# Altium PCB MachRada.PcbDoc
Units mil, origin at the board's own origin, x right, y up, seen from the top; angles counter-clockwise.
Board outline 3200 x 2595 mil, 2 copper layers (Top Layer, Bottom Layer); 35 components, 30 nets, 106 pads, 2085 vias.
Unrouted connection lines stored in the file: 1.
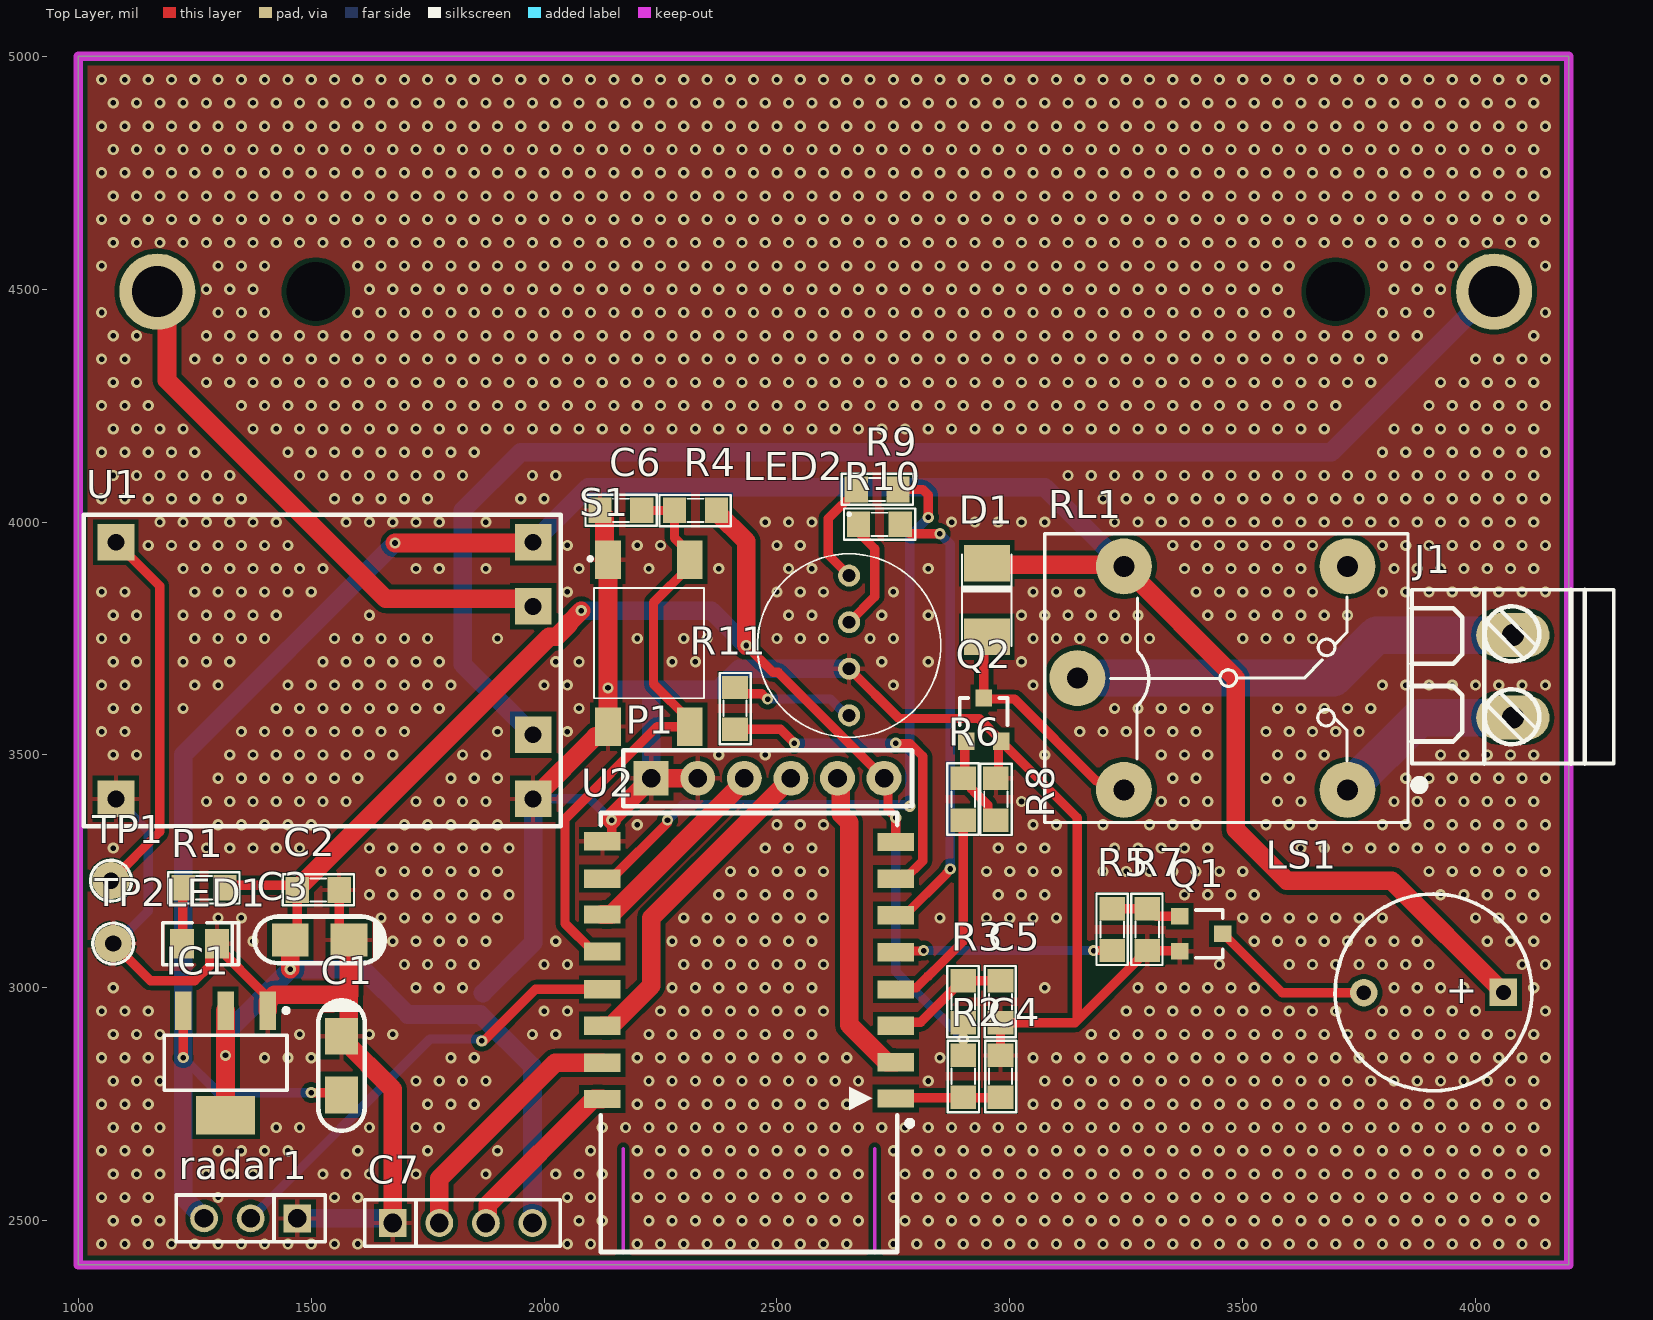
[diagram p0: Top Layer view]
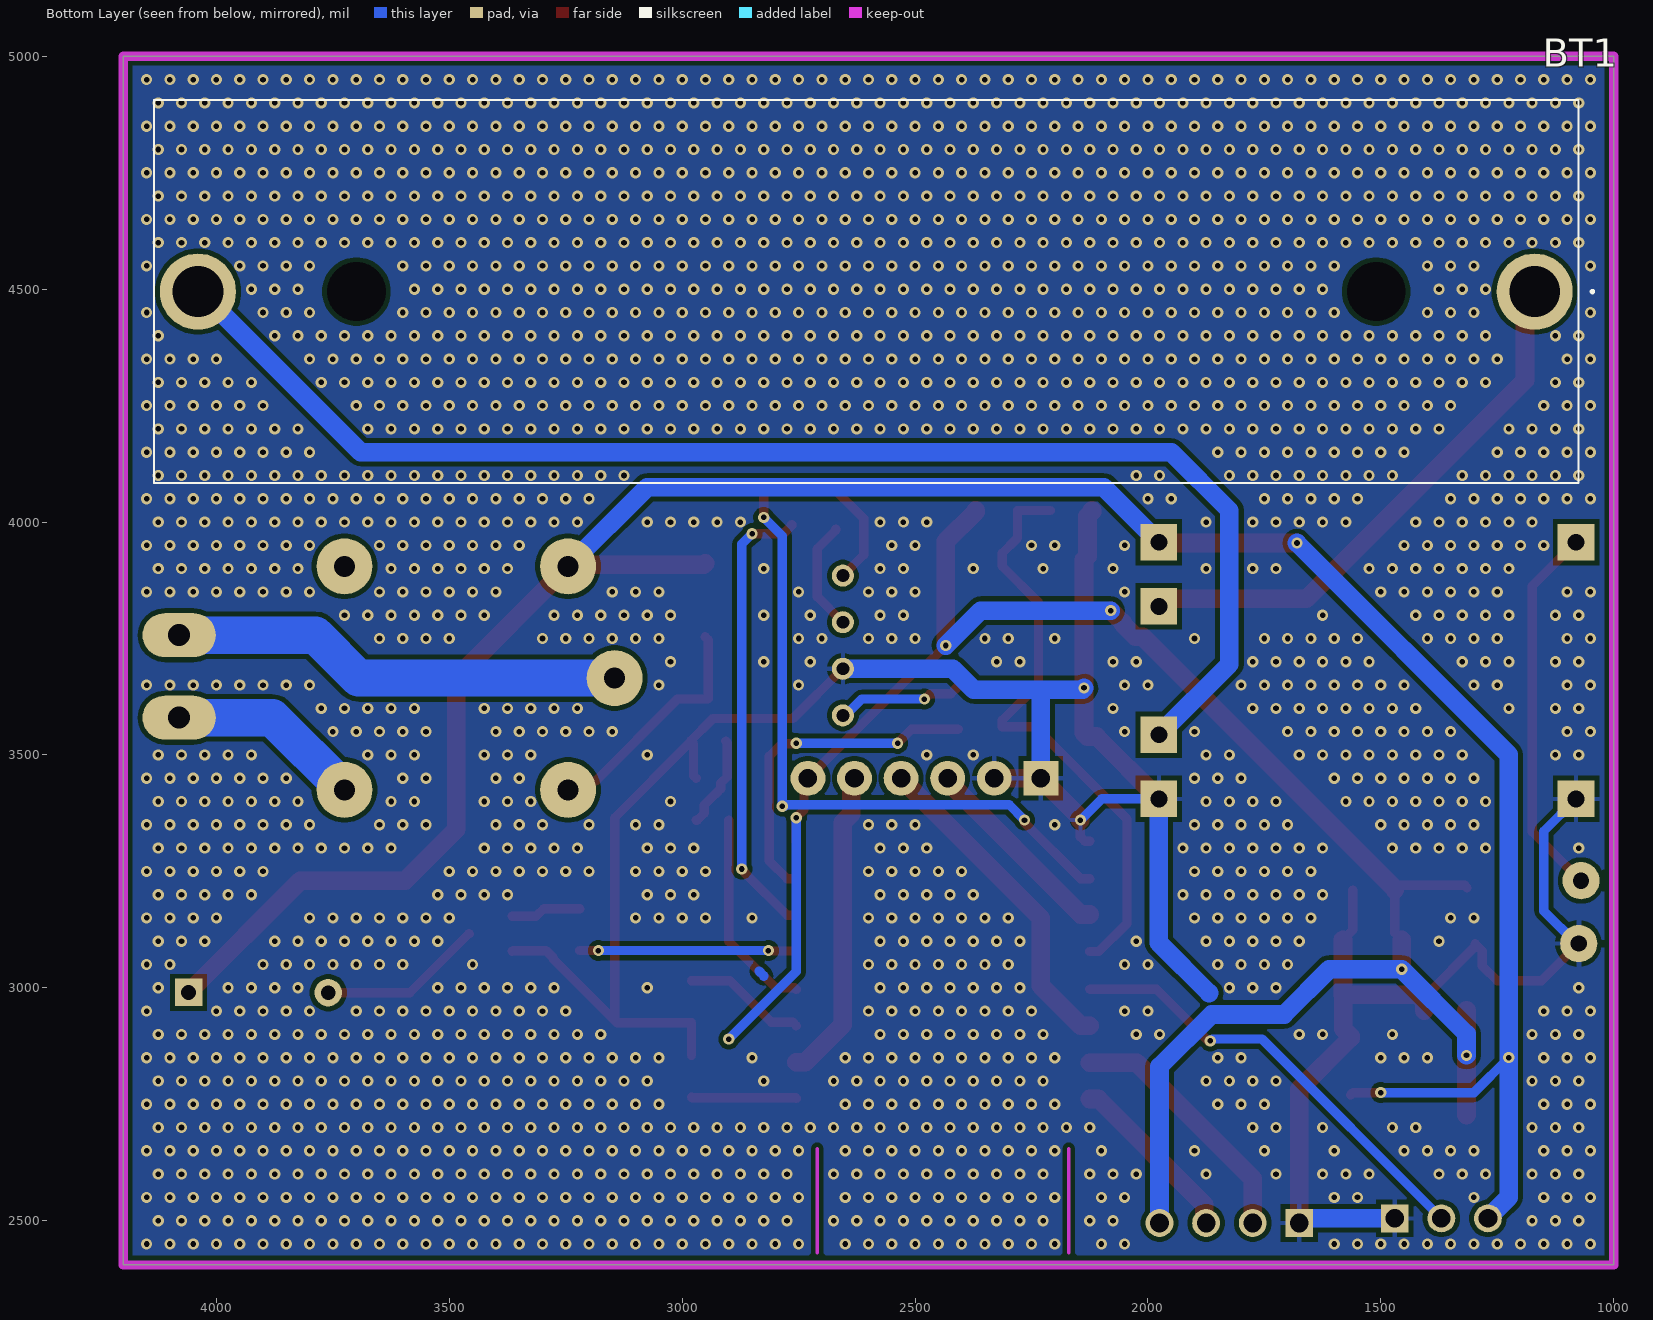
[diagram p1: Bottom Layer view, seen from below]
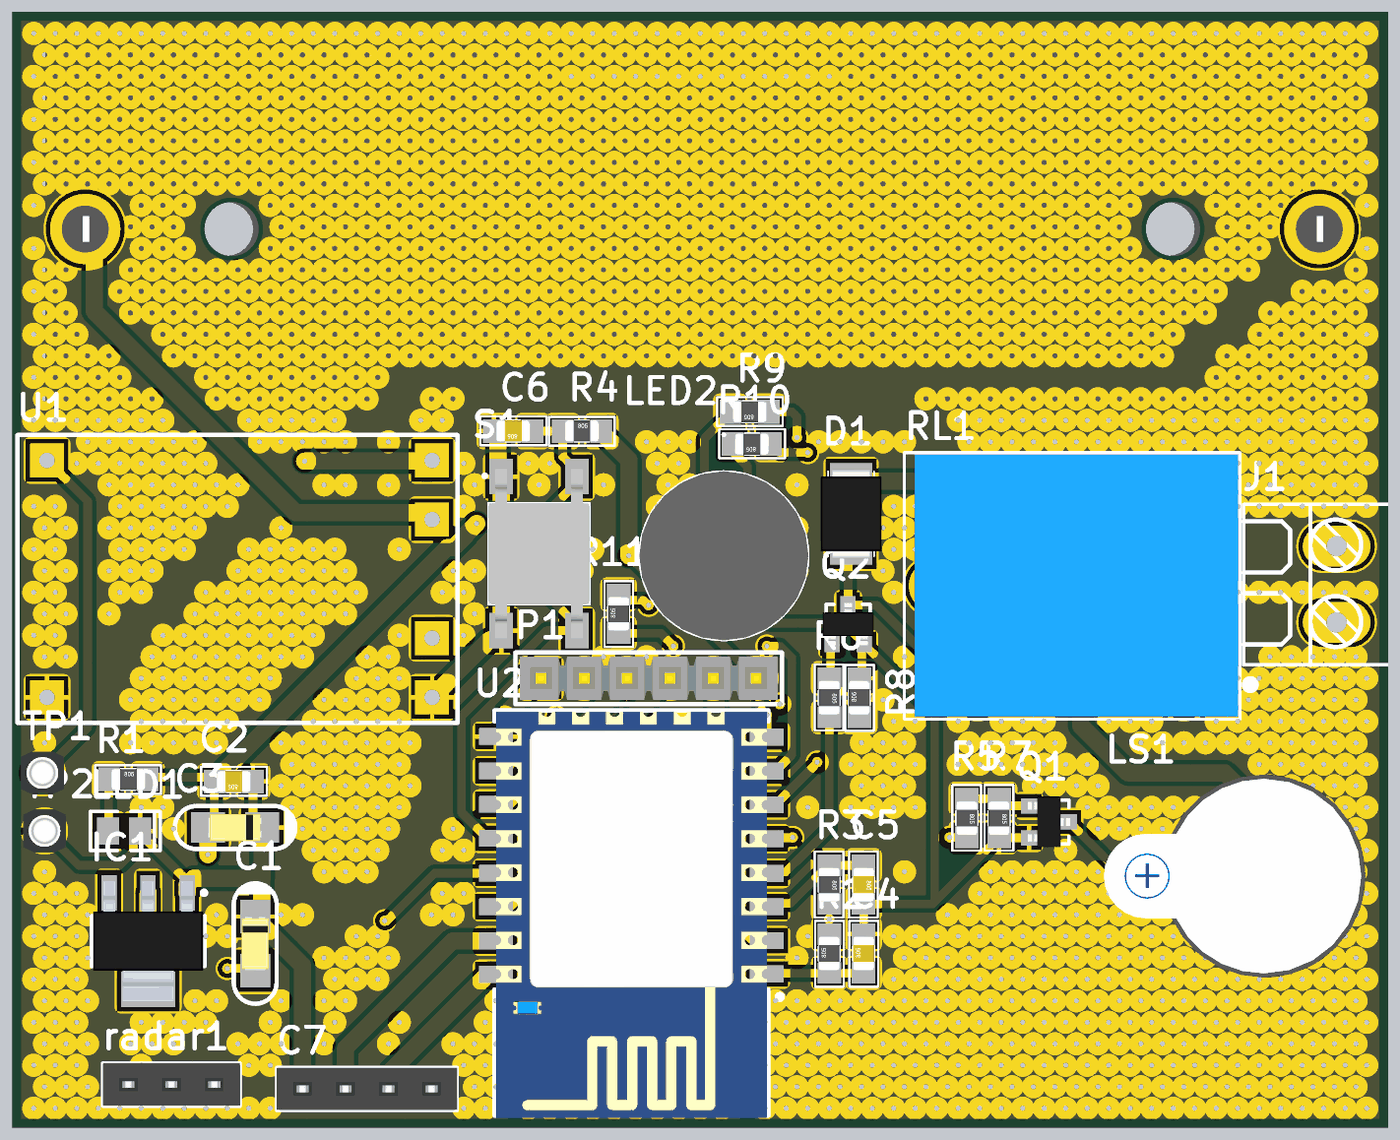
[diagram p2: 3D render of the assembled board from above, using the file's embedded part models]

## Layer stack, top to bottom
Top Solder: solder mask 0.4, Solder Resist, Dk 3.5
Top Layer: signal copper 1.4
Dielectric 1: dielectric 12.6, FR-4, Dk 4.8
Bottom Layer: signal copper 1.4
Bottom Solder: solder mask 0.4, Solder Resist, Dk 3.5

## Board outline
1000,2405 1000,5000 4200,5000 4200,2405

## Design rules (kind name [scope] priority, off if disabled: settings)
Clearance Clearance_1 [All vs InPolygon] p1: gap=10 ignorepadtopadclearanceinfootprint=FALSE except(0: Arc-Hole Track-Hole SMDPad-Hole THPad-Hole Via-Hole Fill-Hole Poly-Hole Region-Hole Text-Hole)
Clearance [All] p2: gap=6 ignorepadtopadclearanceinfootprint=FALSE
PolygonConnect [All] p1: connectstyle=Relief reliefconductorwidth=10 reliefentries=4 polygonreliefangle="90 Angle" airgapwidth=10
RoutingVias [All] p1: holewidth=12 width=24 viastyle="Through Hole" minholewidth=12 minwidth=24 maxholewidth=12 maxwidth=24
SolderMaskExpansion SolderMaskExpansion_1 [IsVia] p1: expansion=4 istentingtop=FALSE
SolderMaskExpansion [All] p2: expansion=15 istentingtop=FALSE
Width [All] p1: maxlimit=80 minlimit=10 preferedwidth=40
30 further rules are at their usual default settings.

## Components (designator, comment, footprint, x,y, rotation, side; value= is the part's Value field where it differs from the comment)
BT1 "BH-18650-PC" "PIN 18650PC" 1169.65,4495 r0 bottom
C1 "10uF" C1206 1568,2840 r180 top value=0,1uF/300V
C2 "0,1uF" SM-CAP-0805 1560,3210 r180 top value=0,1uF/300V
C3 "10uF" C1206 1525,3100 r90 top value=0,1uF/300V
C4 "100nF" SM-CAP-0805 2980,2765 r90 top value=0,1uF/300V
C5 "100nF" SM-CAP-0805 2980,3015 r270 top value=0,1uF/300V
C6 "100nF" SM-CAP-0805 2210,4025 r180 top value=0,1uF/300V
C7 "JP4" JP4-C1T 1675,2495 r0 top
D1 "SS34" DIOT 2950,3865 r0 top
IC1 "LM1117" LM1117-3V3-5V 1335,2800 r270 top value=LM317
J1 "DOMINO2" DOMINO2 4106.54,3704.61 r180 top (schematic designator j1)
LED1 "HSMH-C170" LED 1250,3095 r180 top
LED2 "COM-11120" "LED RGB 10MM" 2655,3885 r270 top
LS1 "SPEAKER" speaker 4060,2990 r180 top
P1 "Header 6" "Header 6" 2230,3450 r0 top
Q1 "MMBT3904" "MMBT 3904" 3430,3115 r270 top
Q2 "MMBT3904" "MMBT 3904" 2945,3595 r0 top
R1 "1k" SM-RES-0805 1225,3215 r0 top value="R1/4W - 1K"
R2 "1k" SM-RES-0805 2900,2765 r90 top value="R1/4W - 1K"
R3 "1k" SM-RES-0805 2900,3015 r270 top value="R1/4W - 1K"
R4 "1k" SM-RES-0805 2280,4025 r0 top value="R1/4W - 1K"
R5 "1k" SM-RES-0805 3220,3170 r270 top value="R1/4W - 1K"
R6 "1k" SM-RES-0805 2900,3450 r270 top value="R1/4W - 1K"
R7 "1k" SM-RES-0805 3295,3170 r270 top value="R1/4W - 1K"
R8 "1k" SM-RES-0805 2970,3360 r90 top value="R1/4W - 1K"
R9 "1k" SM-RES-0805 2760,4070 r180 top value="R1/4W - 1K"
R10 "1k" SM-RES-0805 2765,3995 r180 top value="R1/4W - 1K"
R11 "1k" SM-RES-0805 2410,3555 r90 top value="R1/4W - 1K"
radar1 "JP3" JP3-C1T 1470,2505 r180 top
RL1 "Relay 10A/12V" "RELAY 5" 3470,3665 r0 top value="Relay SPDT, 10A, 12V"
S1 "3-1437565-0" "Button SMD" 2225,3740 r0 top
TP1 "TP" TP1 1070,3230 r90 top value="Test Point"
TP2 "TP" TP1 1075,3095 r90 top value="Test Point"
U1 "Module TP4056" "Module TP4056" 1420,3850 r0 top
U2 "MODUL ESP 8266" "esp8622 v7" 2406.04,2951.11 r180 top

## Footprints (in the part's own frame and the unit in brackets; to place one, negate y for a bottom-side part, rotate by r counter-clockwise, add the part's x,y. Pads: shape width x height; smd on the part's side, far side on the other; paste and mask are expansions set on the pad)
"Button SMD" [mm]
  rect 1.4x2.1 smd: 1(-2.23,4.55) 2(-2.23,-4.55) 3(2.23,4.55) 4(2.23,-4.55)
  silkscreen extent -3.3,-3 3,4.7, body extent -3,-5 3,5, height 4.38
C1206 [mil]
  rect 70.87x78.74 smd: 1(3,-56) 2(3,70)
  silkscreen extent -47,-133 53,147, body extent -29,-56 34,70, height 63
DIOT [mm]
  rect 2.5x2 smd: 1(0.019,-2.824) 2(0.019,1.176)
  silkscreen extent -1.33,-3.32 1.42,1.68, body extent -1.78,-3.47 1.82,1.83, height 2.45
DOMINO2 [mm]
  oval 4x2.4 hole 1.2: 1(0.674,3.165) 2(0.674,-1.335)
  silkscreen extent -4.83,-3.81 6.17,7.09, body extent -4.83,-3.81 6.17,5.67, height 8.6
"esp8622 v7" [mm]
  rect 2x1 smd: 1(-8.864,4.792) 2(-8.864,2.822) 3(-8.864,0.822) 4(-8.864,-1.148) 5(-8.864,-3.188) 6(-8.864,-5.198) 7(-8.864,-7.188) 8(-8.864,-9.198) 9(7.136,-9.238) 10(7.136,-7.198) 11(7.136,-5.238) 12(7.136,-3.218) 13(7.136,-1.158) 14(7.136,0.822) 15(7.136,2.842) 16(7.136,4.822)
  Keep-Out Layer lines w0.203: 5.994,13.189 5.994,7.544 ; -7.722,13.189 -7.722,7.544
  silkscreen extent -9.78,-10.78 7.22,13.16, body extent -8.86,-10.7 7.14,13.3, height 2.75
"Header 6" [mil] "Connector; Header; 6 Position; Solder Pad 35mil"
  rect 75x75 hole 40: 1(0,0)
  round 75 hole 40: 2(100,0) 3(200,0) 4(300,0) 5(400,0) 6(500,0)
  silkscreen extent -60,-60 560,60, body extent -50,-50 550,50, height 330
JP3-C1T [mm] "3 row, straight, gold plating"
  rect 1.52x1.52 hole 1.02: 1(0,0)
  round 1.52 hole 1.02: 2(2.54,0) 3(5.08,0)
  silkscreen extent -1.52,-1.27 6.6,1.27, body extent -1.52,-1.25 6.6,1.25, height 8.51
JP4-C1T [mm] "4 row, straight, gold plating"
  rect 1.52x1.52 hole 1.02: 1(0,0)
  round 1.52 hole 1.02: 2(2.54,0) 3(5.08,0) 4(7.62,0)
  silkscreen extent -1.52,-1.27 9.14,1.27, body extent -1.52,-1.25 9.14,1.25, height 8.51
LED [mm]
  rect 1.3x1.6 smd: 1(0.694,0.006) 2(-1.206,0.006)
  silkscreen extent -2.39,-1.14 1.74,1.16, body extent -1.33,-0.64 0.83,0.64, height 1.14
"LED RGB 10MM" [mm]
  round 1.2 hole 0.7: 1(0,0) 2(2.54,0) 3(5.08,0) 4(7.62,0)
  silkscreen extent -3.4,-5 8.81,5, body extent -1.19,-5 8.81,5, height 13.1
LM1117-3V3-5V [mm]
  rect 2.1x0.9 smd: 1(-3.841,1.817) 2(-3.841,-0.483) 3(-3.841,-2.783)
  rect 2.1x3.2 smd: 2(1.859,-0.483)
  silkscreen extent -3.97,-3.83 0.51,2.94, body extent -4.53,-3.73 2.55,2.77, height 1.65
"MMBT 3904" [mm]
  rect 0.9x0.95 smd: 1(-0.975,-1.658) 2(0.925,-1.658) 3(-0.025,0.692)
  silkscreen extent -1.33,-0.78 1.27,0.69, body extent -1.53,-1.73 1.47,0.77, height 1.08
"Module TP4056" [mm]
  rect 2x2 hole 0.914: 1(-8.615,2.713) 2(-8.615,-11.287) 3(14.135,2.713) 4(14.135,-11.287) 5(14.135,-0.787) 6(14.135,-7.787)
  silkscreen extent -10.36,-12.79 15.63,4.21
"PIN 18650PC" [mm]
  round 4.155 hole 2.77: 1(0,0) 2(72.9,0)
  round 1.6 hole 3.2 unplated: MH1(8.645,0) MH2(64.255,0)
  silkscreen extent -3.2,-10.45 75.3,10.45, body extent -2.35,-10.45 75.35,10.45, height 21.71
"RELAY 5" [mil] "Reley DPDT, 8 pin, 1A, W400mil, L800mil,H 300mil"
  round 120 hole 45: 1(-325,0) 2(255,240) 3(255,-240) 4(-225,-240) 5(-225,240)
  silkscreen extent -395,-310 385,310, body extent -371,-304 381,306, height 602
SM-CAP-0805 [mil]
  rect 50x55 smd: 1(0,0) 2(90,0)
  silkscreen extent -32,-34 121,33, body extent 6,-25 84,25, height 31
SM-RES-0805 [mil]
  rect 50x55 smd: 1(0,0) 2(90,0)
  silkscreen extent -32,-34 121,33, body extent 6,-25 84,25, height 31
speaker [mm]
  rect 1.5x1.5 hole 0.8: 1(0,0)
  round 1.5 hole 0.8: 2(7.62,0.013)
  silkscreen extent -1.55,-5.38 9.18,5.36, body extent -2.22,-6 13.24,6, height 4.5
TP1 [mil] "Test point"
  round 80 hole 35: 1(0,0)
  silkscreen extent -44,-44 44,44, body extent -50,-50 50,50, height 178

## Part data
BT1: library part "PIN 18650-PC", "Battery", Manufacturer_Name="MPD (Memory Protection Devices)", Datasheet Link=http://www.memoryprotectiondevices.com/datasheets/BH-18650-PC-datasheet.pdf, Height=21.31mm, Manufacturer_Part_Number=BH-18650-PC
C1: library part CN, "10uF/25V", Designed by=VanDungEvn
C2 C3 C4 C5 C6: library part CN, "0,1uF/300V", Designed by=VanDungEvn
C7: "WR-PHD 2.54 mm Angled Socket Header", Manufacturer="W¨¹rth Elektronik eiSos GmbH", partNo=613004143121, ComponentLink1 Description=Manufacturer, ComponentLink1URL=http://www.we-online.com, ComponentLink2 Description=Datasheet, ComponentLink2URL=http://katalog.we-online.de/em/datasheet/6130xx143121.pdf, Created by="Karrer Zheng", Created Date="29 March 2013", NoPins=04
D1: library part "Diode 1N4007", "1 Amp General Purpose Rectifier", Code_JEDEC=DO-204-AL, ComponentLink1Description="Manufacturer Link", ComponentLink1URL=http://www.fairchildsemi.com/, ComponentLink2Description=Datasheet, ComponentLink2URL=http://www.fairchildsemi.com/ds/1N%2F1N4001.pdf, DatasheetVersion=1998, LatestRevisionDate=17-Jul-2002, LatestRevisionNote="Re-released for DXP Platform.", PackageDescription="Diode, Axial; Body 5.2 x 2.7 mm (LxDia. max), Lead Dia. 0.86 mm (max)", PackageReference=DO-41, PackageVersion=Aug-1999, Published=8-Jun-2000, Publisher="Altium Limited"
IC1: "3v3"
LED1: library part LED_1, "Typical GaAs SMD LED", Color=RED, Manufacturer="Lite-On Inc", ComponentLink1Description="Digikey Part Link", ComponentLink2Description="Open Datasheet", ComponentLink2URL=H:\LIBRARY\LIBRARY.Datasheet\, Published=13-April-2009, Publisher="Hoang Nguyen", Type="Cong ty RP", Vendor=Digikey
LED2: library part "LED RGB 10MM", "LED", Manufacturer_Name=SparkFun, Mouser Part Number=474-COM-11120, Arrow Part Number=COM-11120, Arrow Price/Stock=https://www.arrow.com/en/products/com-11120/sparkfun-electronics, Datasheet Link=http://cdn.sparkfun.com/datasheets/Components/General/YSL-R1047CR4G3BW-F8.pdf, Height=13mm, Manufacturer_Part_Number=COM-11120, Mouser Price/Stock=https://www.mouser.co.uk/ProductDetail/SparkFun/COM-11120?qs=WyAARYrbSnauAm%2FsFIz3Fw%3D%3D
P1: "Header, 6-Pin", LatestRevisionDate=17-Jul-2002, LatestRevisionNote="Re-released for DXP Platform.", Publisher="Altium Limited"
R1 R2 R3 R4 R5 R6 R7 R8 R9 R10 R11: library part R_1, "Resistor 1/4W"
radar1: "WR-PHD 2.54 mm Angled Socket Header", Manufacturer="W¨¹rth Elektronik eiSos GmbH", partNo=613003143121, ComponentLink1 Description=Manufacturer, ComponentLink1URL=http://www.we-online.com, ComponentLink2 Description=Datasheet, ComponentLink2URL=http://katalog.we-online.de/em/datasheet/6130xx143121.pdf, Created by="Karrer Zheng", Created Date="29 March 2013", NoPins=03
RL1: library part "Relay 5", "Relay SPDT,10A - 5VDC 5 Pin"
S1: library part Button, "Switch", Manufacturer_Name="TE Connectivity", Mouser Part Number=506-3-1437565-0, Arrow Part Number=3-1437565-0, Arrow Price/Stock=https://www.arrow.com/en/products/3-1437565-0/te-connectivity, Datasheet Link=https://www.te.com/commerce/DocumentDelivery/DDEController?Action=showdoc&DocId=Customer+Drawing%7F2-1437565-7%7FV%7Fpdf%7FEnglish%7FENG_CD_2-1437565-7_V.pdf%7F3-1437565-0, Height=4.39mm, Manufacturer_Part_Number=3-1437565-0, Mouser Price/Stock=https://www.mouser.co.uk/ProductDetail/TE-Connectivity-PB/3-1437565-0?qs=%2FwXgF%2FfIho%2FDAgSy8ONeew%3D%3D
TP1 TP2: library part TP1, "Test Point"
U2: library part "MODUL ESP 8622"
LS1: ComponentLink1Description="Digikey Part Link", ComponentLink2Description="Open Datasheet", ComponentLink2URL=H:\LIBRARY\LIBRARY.Datasheet\, Published=13-April-2009, Publisher="Hoang Nguyen", Vendor=Digikey

## Via types
v1: diameter 24, hole 12, Top Layer to Bottom Layer, 2085 vias

## Nets (pads, with @x,y where several pads share a name; then routed paths per layer and width w, separated by ;. In a path a pad name is that pad's centre, name@x,y a point inside that pad or via, vN(x,y) a via of type N, cw(c..) or ccw(c..) an arc to the next point about the centre after c; other vN are vias at no path point)
3V3: C2.2 C3.2 C7.4 IC1.2 P1.6 R1.2 R2.2 R3.2 R4.2 U2.8 | length 4392.3
  Top Layer w20: R1.2 1320,3220 C2.2@1460,3220 ; C3.2 1470,3118 C2.2 ; v1(2433.92,3735) 2491.42,3677.5 2502.5,3677.5 P1.6 2738.58,3441.42 2738.58,3382.5 2755,3366.08 v1(2755,3365) U2.8
  Top Layer w40: IC1.2@1316,2726.8 v1(1316,2855) IC1.2@1316,2951.2 ; v1(1455,3040) C3.2 ; C2.2 1470,3212.5 2011.14,3753.64 2026.64,3753.64 2053.32,3780.32 2053.32,3783.32 v1(2080,3810) ; R4.2 2370,4022.5 2433.92,3958.58 v1(2433.92,3735)
  Bottom Layer w20: v1(2755,3365) 2755,3035 v1(2900,2890)
  Bottom Layer w40: v1(1316,2855) 1316,2901 v1(1455,3040) 1610.46,3040 1707.66,2942.8 1863.12,2942.8 1975,2830.91 C7.4 ; v1(2080,3810) 2358.92,3810 v1(2433.92,3735)
5V: TP1.1 U1.1 | length 809.3
  Top Layer w20: TP1.1 1175,3335 1175,3862.63 U1.1
ADC: P1.5 U2.2 | length 672.9
  Top Layer w40: P1.5 2636.7,3443.3 2636.7,3373.3 2655,3355 2655,2920.94 2735.94,2840 U2.2
EN: C5.1 R3.1 U2.3 | length 264.9
  Top Layer w20: U2.3 2762.62,2926.36 2808.86,2926.36 2897.5,3015 C5.1
GND: C1.1 C2.1 C3.1 C4.2 C5.2 C6.2 C7.1 IC1.1 LED1.2 LED2.3 P1.1 P1.2 Q1.2 Q2.2 R7.2 R8.2 radar1.1 S1.1 S1.2 TP2.1 U1.2 U1.4 U2.9 | length 6087
  Top Layer w20: TP2.1 1155,3015 1250,3015 1281.91,3046.91 1281.91,3079.19 LED1.2 1297.5,3088.87 1398.84,2987.54 1398.84,2958.92 IC1.1 ; C2.1 1560,3124 C3.1 ; U2.9 2135.31,3314.8 2145,3324.49 v1(2145,3360) ; LED2.3 2761.93,3578.07 2934.06,3578.07 2981.4,3530.72 Q2.2 ; R8.2 2975.7,3455.7 2975.7,3524.04 Q2.2 ; C4.2 C5.2 3140.13,2925 3145,2929.87 ; Q1.2 3364.04,3079.3 3295.7,3079.3 R7.2 3292.5,3080 3277.5,3065 3277.5,3062.37 3145,2929.87 ; Q2.2 2981.4,3528.76 3145,3365.16 3145,2929.87
  Top Layer w40: IC1.1 1406.55,2970.26 1421.29,2985 1581,2985 ; C3.1 1581,2985 ; C7.1 1675,2782.06 1565,2892.06 C1.1 1580.43,2911.43 1580.43,2984.43 1581,2985 ; U1.4 2110.4,3539.53 2129.64,3539.53 2137.2,3547.09 S1.2 v1(2137.2,3643.88) S1.1 2129.64,3926.69 2129.64,4012.86 2120,4022.5 C6.2 ; v1(2145,3360) 2145,3365 P1.1 P1.2
  Bottom Layer w20: TP2.1 1080,3095 1150,3165 1150,3336.45 U1.2 ; U1.4 2099.38,3405.62 v1(2145,3360)
  Bottom Layer w40: radar1.1 1665,2505 C7.1 ; 1868.8,2988.8 1976.5,3096.5 U1.4 ; v1(2137.2,3643.88) 2140,3640 2235,3640 ; P1.1 2230,3635 2235,3640 ; LED2.3 2419.02,3685 2374.02,3640 2235,3640
  other v1: 1050,2450 1100,2450 1150,2450 1200,2450 1250,2450 1300,2450 1350,2450 1400,2450 1450,2450 1500,2450 1550,2450 1600,2450 2050,2450 2100,2450 2200,2450 2250,2450 2300,2450 2350,2450 2400,2450 2450,2450 2500,2450 2550,2450 2600,2450 2650,2450 2750,2450 2800,2450 2850,2450 2900,2450 2950,2450 3000,2450 3050,2450 3100,2450 3150,2450 3200,2450 3250,2450 3300,2450 3350,2450 3400,2450 3450,2450 3500,2450 3550,2450 3600,2450 3650,2450 3700,2450 3750,2450 3800,2450 3850,2450 3900,2450 3950,2450 4000,2450 4050,2450 4100,2450 4150,2450 1075,2500 1125,2500 1175,2500 2075,2500 2125,2500 2225,2500 2275,2500 2325,2500 2375,2500 2425,2500 2475,2500 2525,2500 2575,2500 2625,2500 2675,2500 2775,2500 2825,2500 2875,2500 2925,2500 2975,2500 3025,2500 3075,2500 3125,2500 3175,2500 3225,2500 3275,2500 3325,2500 3375,2500 3425,2500 3475,2500 3525,2500 3575,2500 3625,2500 3675,2500 3725,2500 3775,2500 3825,2500 3875,2500 3925,2500 3975,2500 4025,2500 4075,2500 4125,2500 1050,2550 1100,2550 1150,2550 1300,2550 1550,2550 1600,2550 2050,2550 2100,2550 2200,2550 2250,2550 2300,2550 2350,2550 2400,2550 2450,2550 2500,2550 2550,2550 2600,2550 2650,2550 2750,2550 2800,2550 2850,2550 2900,2550 2950,2550 3000,2550 3050,2550 3100,2550 3150,2550 3200,2550 3250,2550 3300,2550 3350,2550 3400,2550 3450,2550 3500,2550 3550,2550 3600,2550 3650,2550 3700,2550 3750,2550 3800,2550 3850,2550 3900,2550 3950,2550 4000,2550 4050,2550 4100,2550 4150,2550 1075,2600 1125,2600 1175,2600 1275,2600 1325,2600 1375,2600 1525,2600 1575,2600 1625,2600 1725,2600 1875,2600 2025,2600 2075,2600 2125,2600 2225,2600 2275,2600 2325,2600 2375,2600 2425,2600 2475,2600 2525,2600 2575,2600 2625,2600 2675,2600 2775,2600 2825,2600 2875,2600 2925,2600 2975,2600 3025,2600 3075,2600 3125,2600 3175,2600 3225,2600 3275,2600 3325,2600 3375,2600 3425,2600 3475,2600 3525,2600 3575,2600 3625,2600 3675,2600 3725,2600 3775,2600 3825,2600 3875,2600 3925,2600 3975,2600 4025,2600 4075,2600 4125,2600 1050,2650 1100,2650 1150,2650 1300,2650 1350,2650 1400,2650 1450,2650 1600,2650 1750,2650 1900,2650 2100,2650 2200,2650 2250,2650 2300,2650 2350,2650 2400,2650 2450,2650 2500,2650 2550,2650 2600,2650 2650,2650 2750,2650 2800,2650 2850,2650 2900,2650 2950,2650 3000,2650 3050,2650 3100,2650 3150,2650 3200,2650 3250,2650 3300,2650 3350,2650 3400,2650 3450,2650 3500,2650 3550,2650 3600,2650 3650,2650 3700,2650 3750,2650 3800,2650 3850,2650 3900,2650 3950,2650 4000,2650 4050,2650 4100,2650 4150,2650 1075,2700 1125,2700 1175,2700 1425,2700 1475,2700 1625,2700 1725,2700 1775,2700 2125,2700 2175,2700 2225,2700 2275,2700 2325,2700 2375,2700 2425,2700 2475,2700 2525,2700 2575,2700 2625,2700 2675,2700 2725,2700 2775,2700 2825,2700 2875,2700 2925,2700 2975,2700 3025,2700 3075,2700 3125,2700 3175,2700 3225,2700 3275,2700 3325,2700 3375,2700 3425,2700 3475,2700 3525,2700 3575,2700 3625,2700 3675,2700 3725,2700 3775,2700 3825,2700 3875,2700 3925,2700 3975,2700 4025,2700 4075,2700 4125,2700 1050,2750 1100,2750 1150,2750 1750,2750 1800,2750 1850,2750 2200,2750 2250,2750 2300,2750 2350,2750 2400,2750 2450,2750 2500,2750 2550,2750 2600,2750 2650,2750 3050,2750 3100,2750 3150,2750 3200,2750 3250,2750 3300,2750 3350,2750 3400,2750 3450,2750 3500,2750 3550,2750 3600,2750 3650,2750 3700,2750 3750,2750 3800,2750 3850,2750 3900,2750 3950,2750 4000,2750 4050,2750 4100,2750 4150,2750 1075,2800 1125,2800 1175,2800 1725,2800 1775,2800 1825,2800 1875,2800 2225,2800 2275,2800 2325,2800 2375,2800 2425,2800 2475,2800 2525,2800 2575,2800 2625,2800 2675,2800 2825,2800 3075,2800 3125,2800 3175,2800 3225,2800 3275,2800 3325,2800 3375,2800 3425,2800 3475,2800 3525,2800 3575,2800 3625,2800 3675,2800 3725,2800 3775,2800 3825,2800 3875,2800 3925,2800 3975,2800 4025,2800 4075,2800 4125,2800 1050,2850 1100,2850 1150,2850 1400,2850 1450,2850 1500,2850 1800,2850 1850,2850 2200,2850 2250,2850 2300,2850 2350,2850 2400,2850 2450,2850 2500,2850 2550,2850 2600,2850 2650,2850 2850,2850 3050,2850 3100,2850 3150,2850 3200,2850 3250,2850 3300,2850 3350,2850 3400,2850 3450,2850 3500,2850 3550,2850 3600,2850 3650,2850 3700,2850 3750,2850 3800,2850 3850,2850 3900,2850 3950,2850 4000,2850 4050,2850 4100,2850 4150,2850 1075,2900 1125,2900 1175,2900 1475,2900 1625,2900 1675,2900 1975,2900 2025,2900 2225,2900 2275,2900 2325,2900 2375,2900 2425,2900 2475,2900 2525,2900 2575,2900 3175,2900 3225,2900 3275,2900 3325,2900 3375,2900 3425,2900 3475,2900 3525,2900 3575,2900 3625,2900 3675,2900 3725,2900 3775,2900 3825,2900 3875,2900 3925,2900 3975,2900 4025,2900 4075,2900 4125,2900 1050,2950 1100,2950 1150,2950 2000,2950 2050,2950 2250,2950 2300,2950 2350,2950 2400,2950 2450,2950 2500,2950 2550,2950 2600,2950 3250,2950 3300,2950 3350,2950 3400,2950 3450,2950 3500,2950 3550,2950 3600,2950 3650,2950 3700,2950 3800,2950 3850,2950 3900,2950 3950,2950 4000,2950 4150,2950 1075,3000 1725,3000 1775,3000 1825,3000 2275,3000 2325,3000 2375,3000 2425,3000 2475,3000 2525,3000 2575,3000 3075,3000 3275,3000 3325,3000 3375,3000 3425,3000 3475,3000 3525,3000 3825,3000 3875,3000 3925,3000 3975,3000 4125,3000 1700,3050 1750,3050 1800,3050 1850,3050 2000,3050 2050,3050 2300,3050 2350,3050 2400,3050 2450,3050 2500,3050 2550,3050 2600,3050 3450,3050 3600,3050 3650,3050 3700,3050 3750,3050 3800,3050 3850,3050 3900,3050 4100,3050 4150,3050 1375,3100 1675,3100 1725,3100 1775,3100 1825,3100 1875,3100 2025,3100 2275,3100 2325,3100 2375,3100 2425,3100 2475,3100 2525,3100 2575,3100 3525,3100 3575,3100 3625,3100 3675,3100 3725,3100 3775,3100 3825,3100 3875,3100 4025,3100 4075,3100 4125,3100 1300,3150 1350,3150 1650,3150 1700,3150 1750,3150 1800,3150 1850,3150 1900,3150 2300,3150 2350,3150 2400,3150 2450,3150 2500,3150 2550,3150 2600,3150 2850,3150 2950,3150 3000,3150 3050,3150 3100,3150 3500,3150 3550,3150 3600,3150 3650,3150 3700,3150 3750,3150 3800,3150 4000,3150 4050,3150 4100,3150 4150,3150 1625,3200 1675,3200 1725,3200 1775,3200 1825,3200 1875,3200 1925,3200 2375,3200 2425,3200 2475,3200 2525,3200 2575,3200 2975,3200 3025,3200 3075,3200 3375,3200 3425,3200 3475,3200 3525,3200 3925,3200 3975,3200 4025,3200 4075,3200 4125,3200 1650,3250 1700,3250 1750,3250 1800,3250 1850,3250 1900,3250 2400,3250 2450,3250 2500,3250 2550,3250 2600,3250 2950,3250 3000,3250 3050,3250 3100,3250 3200,3250 3250,3250 3300,3250 3350,3250 3400,3250 3450,3250 3500,3250 3900,3250 3950,3250 4000,3250 4050,3250 4100,3250 4150,3250 1075,3300 1275,3300 1325,3300 1375,3300 1425,3300 1475,3300 1625,3300 1675,3300 1725,3300 1775,3300 1825,3300 1875,3300 1925,3300 2475,3300 2525,3300 2575,3300 2975,3300 3025,3300 3075,3300 3225,3300 3275,3300 3325,3300 3375,3300 3425,3300 3625,3300 3675,3300 3725,3300 3775,3300 3825,3300 3875,3300 3925,3300 3975,3300 4025,3300 4075,3300 4125,3300 1300,3350 1350,3350 1400,3350 1450,3350 1500,3350 1700,3350 1750,3350 1800,3350 1850,3350 1900,3350 2200,3350 2500,3350 2550,3350 2600,3350 3050,3350 3100,3350 3200,3350 3300,3350 3350,3350 3400,3350 3550,3350 3600,3350 3650,3350 3800,3350 3850,3350 3900,3350 3950,3350 4000,3350 4050,3350 4100,3350 4150,3350 1275,3400 1325,3400 1375,3400 1425,3400 1475,3400 1525,3400 1575,3400 1725,3400 1775,3400 1825,3400 1875,3400 3025,3400 3325,3400 3375,3400 3425,3400 3575,3400 3625,3400 3825,3400 3875,3400 3925,3400 3975,3400 4025,3400 4075,3400 4125,3400 1300,3450 1350,3450 1400,3450 1450,3450 1500,3450 1550,3450 1600,3450 1800,3450 1850,3450 1900,3450 3350,3450 3400,3450 3550,3450 3600,3450 3850,3450 3900,3450 3950,3450 4000,3450 4050,3450 4100,3450 4150,3450 1075,3500 1125,3500 1325,3500 1375,3500 1425,3500 1475,3500 1525,3500 1575,3500 1625,3500 1675,3500 1825,3500 1875,3500 2375,3500 2475,3500 3075,3500 3325,3500 3375,3500 3425,3500 3575,3500 3625,3500 3675,3500 3925,3500 3975,3500 4025,3500 4075,3500 4125,3500 1050,3550 1100,3550 1350,3550 1400,3550 1450,3550 1500,3550 1550,3550 1600,3550 1650,3550 1700,3550 1900,3550 2050,3550 3150,3550 3200,3550 3250,3550 3300,3550 3350,3550 3400,3550 3550,3550 3600,3550 3650,3550 3700,3550 3750,3550 1075,3600 1125,3600 1225,3600 1425,3600 1475,3600 1525,3600 1575,3600 1625,3600 1675,3600 1725,3600 1775,3600 2075,3600 3225,3600 3275,3600 3325,3600 3375,3600 3425,3600 3575,3600 3625,3600 3675,3600 3725,3600 3775,3600 1050,3650 1100,3650 1250,3650 1300,3650 1450,3650 1500,3650 1550,3650 1600,3650 1650,3650 1700,3650 1750,3650 1800,3650 2000,3650 2050,3650 2750,3650 3050,3650 3800,3650 3850,3650 3900,3650 3950,3650 4000,3650 4050,3650 4100,3650 4150,3650 1075,3700 1125,3700 1225,3700 1275,3700 1325,3700 1525,3700 1575,3700 1625,3700 1675,3700 1725,3700 1775,3700 2025,3700 2075,3700 2275,3700 2325,3700 2725,3700 2825,3700 3025,3700 1050,3750 1100,3750 1250,3750 1300,3750 1350,3750 1400,3750 1550,3750 1600,3750 1650,3750 1700,3750 1750,3750 1900,3750 2200,3750 2300,3750 2350,3750 2500,3750 2550,3750 2600,3750 2700,3750 2750,3750 3050,3750 3100,3750 3150,3750 3200,3750 3250,3750 3300,3750 3500,3750 3550,3750 3600,3750 3650,3750 1075,3800 1125,3800 1225,3800 1275,3800 1325,3800 1375,3800 1425,3800 1625,3800 2525,3800 2575,3800 2725,3800 2825,3800 3025,3800 3075,3800 3125,3800 3175,3800 3225,3800 3275,3800 3425,3800 3475,3800 3525,3800 3575,3800 3625,3800 3675,3800 3725,3800 1050,3850 1100,3850 1250,3850 1300,3850 1350,3850 1400,3850 1450,3850 1500,3850 2050,3850 2500,3850 2550,3850 2600,3850 2750,3850 3050,3850 3100,3850 3150,3850 3400,3850 3450,3850 3500,3850 3550,3850 3600,3850 3650,3850 3800,3850 3850,3850 3900,3850 3950,3850 4000,3850 4050,3850 4100,3850 4150,3850 1225,3900 1275,3900 1325,3900 1375,3900 1425,3900 1475,3900 1525,3900 1725,3900 1775,3900 1875,3900 2075,3900 2225,3900 2375,3900 2525,3900 2575,3900 2825,3900 3375,3900 3425,3900 3475,3900 3525,3900 3575,3900 3625,3900 3825,3900 3875,3900 3925,3900 3975,3900 4025,3900 4075,3900 4125,3900 1150,3950 1200,3950 1250,3950 1300,3950 1350,3950 1400,3950 1450,3950 2050,3950 2200,3950 2250,3950 2500,3950 2550,3950 3350,3950 3400,3950 3450,3950 3500,3950 3550,3950 3600,3950 3650,3950 3800,3950 3850,3950 3900,3950 3950,3950 4000,3950 4050,3950 4100,3950 4150,3950 1175,4000 1225,4000 1275,4000 1325,4000 1375,4000 1425,4000 1575,4000 1625,4000 1675,4000 1725,4000 1775,4000 1875,4000 2475,4000 2525,4000 2575,4000 2875,4000 2925,4000 2975,4000 3025,4000 3075,4000 3225,4000 3275,4000 3325,4000 3375,4000 3425,4000 3475,4000 3525,4000 3575,4000 3625,4000 3675,4000 3725,4000 3775,4000 3825,4000 3875,4000 3925,4000 3975,4000 4025,4000 4075,4000 4125,4000 1050,4050 1100,4050 1150,4050 1200,4050 1250,4050 1300,4050 1350,4050 1550,4050 1600,4050 1650,4050 1700,4050 1750,4050 1950,4050 2000,4050 3200,4050 3250,4050 3300,4050 3350,4050 3400,4050 3450,4050 3500,4050 3550,4050 3600,4050 3650,4050 3700,4050 3750,4050 3800,4050 3850,4050 3900,4050 3950,4050 4000,4050 4050,4050 4100,4050 4150,4050 1075,4100 1125,4100 1175,4100 1225,4100 1275,4100 1325,4100 1475,4100 1525,4100 1575,4100 1625,4100 1675,4100 1725,4100 1775,4100 1825,4100 1975,4100 2025,4100 3125,4100 3175,4100 3225,4100 3275,4100 3325,4100 3375,4100 3425,4100 3475,4100 3525,4100 3575,4100 3625,4100 3675,4100 3725,4100 3775,4100 3825,4100 3875,4100 3925,4100 3975,4100 4025,4100 4075,4100 4125,4100 1050,4150 1100,4150 1150,4150 1200,4150 1250,4150 1450,4150 1500,4150 1550,4150 1600,4150 1650,4150 1700,4150 1750,4150 1800,4150 1850,4150 3800,4150 3850,4150 3900,4150 3950,4150 4000,4150 4050,4150 4100,4150 4150,4150 1075,4200 1125,4200 1175,4200 1225,4200 1375,4200 1425,4200 1475,4200 1525,4200 1575,4200 1625,4200 1675,4200 1725,4200 1775,4200 1825,4200 1875,4200 1925,4200 1975,4200 2025,4200 2075,4200 2125,4200 2175,4200 2225,4200 2275,4200 2325,4200 2375,4200 2425,4200 2475,4200 2525,4200 2575,4200 2625,4200 2675,4200 2725,4200 2775,4200 2825,4200 2875,4200 2925,4200 2975,4200 3025,4200 3075,4200 3125,4200 3175,4200 3225,4200 3275,4200 3325,4200 3375,4200 3425,4200 3475,4200 3525,4200 3575,4200 3625,4200 3675,4200 3825,4200 3875,4200 3925,4200 3975,4200 4025,4200 4075,4200 4125,4200 1050,4250 1100,4250 1150,4250 1350,4250 1400,4250 1450,4250 1500,4250 1550,4250 1600,4250 1650,4250 1700,4250 1750,4250 1800,4250 1850,4250 1900,4250 1950,4250 2000,4250 2050,4250 2100,4250 2150,4250 2200,4250 2250,4250 2300,4250 2350,4250 2400,4250 2450,4250 2500,4250 2550,4250 2600,4250 2650,4250 2700,4250 2750,4250 2800,4250 2850,4250 2900,4250 2950,4250 3000,4250 3050,4250 3100,4250 3150,4250 3200,4250 3250,4250 3300,4250 3350,4250 3400,4250 3450,4250 3500,4250 3550,4250 3600,4250 3650,4250 3700,4250 3900,4250 3950,4250 4000,4250 4050,4250 4100,4250 4150,4250 1075,4300 1125,4300 1275,4300 1325,4300 1375,4300 1425,4300 1475,4300 1525,4300 1575,4300 1625,4300 1675,4300 1725,4300 1775,4300 1825,4300 1875,4300 1925,4300 1975,4300 2025,4300 2075,4300 2125,4300 2175,4300 2225,4300 2275,4300 2325,4300 2375,4300 2425,4300 2475,4300 2525,4300 2575,4300 2625,4300 2675,4300 2725,4300 2775,4300 2825,4300 2875,4300 2925,4300 2975,4300 3025,4300 3075,4300 3125,4300 3175,4300 3225,4300 3275,4300 3325,4300 3375,4300 3425,4300 3475,4300 3525,4300 3575,4300 3625,4300 3675,4300 3725,4300 3775,4300 3925,4300 3975,4300 4025,4300 4075,4300 4125,4300 1050,4350 1100,4350 1250,4350 1300,4350 1350,4350 1400,4350 1450,4350 1500,4350 1550,4350 1600,4350 1650,4350 1700,4350 1750,4350 1800,4350 1850,4350 1900,4350 1950,4350 2000,4350 2050,4350 2100,4350 2150,4350 2200,4350 2250,4350 2300,4350 2350,4350 2400,4350 2450,4350 2500,4350 2550,4350 2600,4350 2650,4350 2700,4350 2750,4350 2800,4350 2850,4350 2900,4350 2950,4350 3000,4350 3050,4350 3100,4350 3150,4350 3200,4350 3250,4350 3300,4350 3350,4350 3400,4350 3450,4350 3500,4350 3550,4350 3600,4350 3650,4350 3700,4350 3750,4350 3800,4350 4000,4350 4050,4350 4100,4350 4150,4350 1075,4400 1125,4400 1275,4400 1325,4400 1375,4400 1425,4400 1475,4400 1525,4400 1575,4400 1625,4400 1675,4400 1725,4400 1775,4400 1825,4400 1875,4400 1925,4400 1975,4400 2025,4400 2075,4400 2125,4400 2175,4400 2225,4400 2275,4400 2325,4400 2375,4400 2425,4400 2475,4400 2525,4400 2575,4400 2625,4400 2675,4400 2725,4400 2775,4400 2825,4400 2875,4400 2925,4400 2975,4400 3025,4400 3075,4400 3125,4400 3175,4400 3225,4400 3275,4400 3325,4400 3375,4400 3425,4400 3475,4400 3525,4400 3575,4400 3625,4400 3675,4400 3725,4400 3775,4400 3825,4400 3875,4400 4125,4400 1050,4450 1300,4450 1350,4450 1400,4450 1600,4450 1650,4450 1700,4450 1750,4450 1800,4450 1850,4450 1900,4450 1950,4450 2000,4450 2050,4450 2100,4450 2150,4450 2200,4450 2250,4450 2300,4450 2350,4450 2400,4450 2450,4450 2500,4450 2550,4450 2600,4450 2650,4450 2700,4450 2750,4450 2800,4450 2850,4450 2900,4450 2950,4450 3000,4450 3050,4450 3100,4450 3150,4450 3200,4450 3250,4450 3300,4450 3350,4450 3400,4450 3450,4450 3500,4450 3550,4450 3600,4450 3800,4450 3850,4450 3900,4450 4150,4450 1275,4500 1325,4500 1375,4500 1625,4500 1675,4500 1725,4500 1775,4500 1825,4500 1875,4500 1925,4500 1975,4500 2025,4500 2075,4500 2125,4500 2175,4500 2225,4500 2275,4500 2325,4500 2375,4500 2425,4500 2475,4500 2525,4500 2575,4500 2625,4500 2675,4500 2725,4500 2775,4500 2825,4500 2875,4500 2925,4500 2975,4500 3025,4500 3075,4500 3125,4500 3175,4500 3225,4500 3275,4500 3325,4500 3375,4500 3425,4500 3475,4500 3525,4500 3575,4500 3825,4500 3875,4500 3925,4500 1050,4550 1300,4550 1350,4550 1400,4550 1600,4550 1650,4550 1700,4550 1750,4550 1800,4550 1850,4550 1900,4550 1950,4550 2000,4550 2050,4550 2100,4550 2150,4550 2200,4550 2250,4550 2300,4550 2350,4550 2400,4550 2450,4550 2500,4550 2550,4550 2600,4550 2650,4550 2700,4550 2750,4550 2800,4550 2850,4550 2900,4550 2950,4550 3000,4550 3050,4550 3100,4550 3150,4550 3200,4550 3250,4550 3300,4550 3350,4550 3400,4550 3450,4550 3500,4550 3550,4550 3600,4550 3800,4550 3850,4550 3900,4550 3950,4550 4150,4550 1075,4600 1125,4600 1175,4600 1225,4600 1275,4600 1325,4600 1375,4600 1425,4600 1475,4600 1525,4600 1575,4600 1625,4600 1675,4600 1725,4600 1775,4600 1825,4600 1875,4600 1925,4600 1975,4600 2025,4600 2075,4600 2125,4600 2175,4600 2225,4600 2275,4600 2325,4600 2375,4600 2425,4600 2475,4600 2525,4600 2575,4600 2625,4600 2675,4600 2725,4600 2775,4600 2825,4600 2875,4600 2925,4600 2975,4600 3025,4600 3075,4600 3125,4600 3175,4600 3225,4600 3275,4600 3325,4600 3375,4600 3425,4600 3475,4600 3525,4600 3575,4600 3625,4600 3675,4600 3725,4600 3775,4600 3825,4600 3875,4600 3925,4600 3975,4600 4025,4600 4075,4600 4125,4600 1050,4650 1100,4650 1150,4650 1200,4650 1250,4650 1300,4650 1350,4650 1400,4650 1450,4650 1500,4650 1550,4650 1600,4650 1650,4650 1700,4650 1750,4650 1800,4650 1850,4650 1900,4650 1950,4650 2000,4650 2050,4650 2100,4650 2150,4650 2200,4650 2250,4650 2300,4650 2350,4650 2400,4650 2450,4650 2500,4650 2550,4650 2600,4650 2650,4650 2700,4650 2750,4650 2800,4650 2850,4650 2900,4650 2950,4650 3000,4650 3050,4650 3100,4650 3150,4650 3200,4650 3250,4650 3300,4650 3350,4650 3400,4650 3450,4650 3500,4650 3550,4650 3600,4650 3650,4650 3700,4650 3750,4650 3800,4650 3850,4650 3900,4650 3950,4650 4000,4650 4050,4650 4100,4650 4150,4650 1075,4700 1125,4700 1175,4700 1225,4700 1275,4700 1325,4700 1375,4700 1425,4700 1475,4700 1525,4700 1575,4700 1625,4700 1675,4700 1725,4700 1775,4700 1825,4700 1875,4700 1925,4700 1975,4700 2025,4700 2075,4700 2125,4700 2175,4700 2225,4700 2275,4700 2325,4700 2375,4700 2425,4700 2475,4700 2525,4700 2575,4700 2625,4700 2675,4700 2725,4700 2775,4700 2825,4700 2875,4700 2925,4700 2975,4700 3025,4700 3075,4700 3125,4700 3175,4700 3225,4700 3275,4700 3325,4700 3375,4700 3425,4700 3475,4700 3525,4700 3575,4700 3625,4700 3675,4700 3725,4700 3775,4700 3825,4700 3875,4700 3925,4700 3975,4700 4025,4700 4075,4700 4125,4700 1050,4750 1100,4750 1150,4750 1200,4750 1250,4750 1300,4750 1350,4750 1400,4750 1450,4750 1500,4750 1550,4750 1600,4750 1650,4750 1700,4750 1750,4750 1800,4750 1850,4750 1900,4750 1950,4750 2000,4750 2050,4750 2100,4750 2150,4750 2200,4750 2250,4750 2300,4750 2350,4750 2400,4750 2450,4750 2500,4750 2550,4750 2600,4750 2650,4750 2700,4750 2750,4750 2800,4750 2850,4750 2900,4750 2950,4750 3000,4750 3050,4750 3100,4750 3150,4750 3200,4750 3250,4750 3300,4750 3350,4750 3400,4750 3450,4750 3500,4750 3550,4750 3600,4750 3650,4750 3700,4750 3750,4750 3800,4750 3850,4750 3900,4750 3950,4750 4000,4750 4050,4750 4100,4750 4150,4750 1075,4800 1125,4800 1175,4800 1225,4800 1275,4800 1325,4800 1375,4800 1425,4800 1475,4800 1525,4800 1575,4800 1625,4800 1675,4800 1725,4800 1775,4800 1825,4800 1875,4800 1925,4800 1975,4800 2025,4800 2075,4800 2125,4800 2175,4800 2225,4800 2275,4800 2325,4800 2375,4800 2425,4800 2475,4800 2525,4800 2575,4800 2625,4800 2675,4800 2725,4800 2775,4800 2825,4800 2875,4800 2925,4800 2975,4800 3025,4800 3075,4800 3125,4800 3175,4800 3225,4800 3275,4800 3325,4800 3375,4800 3425,4800 3475,4800 3525,4800 3575,4800 3625,4800 3675,4800 3725,4800 3775,4800 3825,4800 3875,4800 3925,4800 3975,4800 4025,4800 4075,4800 4125,4800 1050,4850 1100,4850 1150,4850 1200,4850 1250,4850 1300,4850 1350,4850 1400,4850 1450,4850 1500,4850 1550,4850 1600,4850 1650,4850 1700,4850 1750,4850 1800,4850 1850,4850 1900,4850 1950,4850 2000,4850 2050,4850 2100,4850 2150,4850 2200,4850 2250,4850 2300,4850 2350,4850 2400,4850 2450,4850 2500,4850 2550,4850 2600,4850 2650,4850 2700,4850 2750,4850 2800,4850 2850,4850 2900,4850 2950,4850 3000,4850 3050,4850 3100,4850 3150,4850 3200,4850 3250,4850 3300,4850 3350,4850 3400,4850 3450,4850 3500,4850 3550,4850 3600,4850 3650,4850 3700,4850 3750,4850 3800,4850 3850,4850 3900,4850 3950,4850 4000,4850 4050,4850 4100,4850 4150,4850 1075,4900 1125,4900 1175,4900 1225,4900 1275,4900 1325,4900 1375,4900 1425,4900 1475,4900 1525,4900 1575,4900 1625,4900 1675,4900 1725,4900 1775,4900 1825,4900 1875,4900 1925,4900 1975,4900 2025,4900 2075,4900 2125,4900 2175,4900 2225,4900 2275,4900 2325,4900 2375,4900 2425,4900 2475,4900 2525,4900 2575,4900 2625,4900 2675,4900 2725,4900 2775,4900 2825,4900 2875,4900 2925,4900 2975,4900 3025,4900 3075,4900 3125,4900 3175,4900 3225,4900 3275,4900 3325,4900 3375,4900 3425,4900 3475,4900 3525,4900 3575,4900 3625,4900 3675,4900 3725,4900 3775,4900 3825,4900 3875,4900 3925,4900 3975,4900 4025,4900 4075,4900 4125,4900 1050,4950 1100,4950 1150,4950 1200,4950 1250,4950 1300,4950 1350,4950 1400,4950 1450,4950 1500,4950 1550,4950 1600,4950 1650,4950 1700,4950 1750,4950 1800,4950 1850,4950 1900,4950 1950,4950 2000,4950 2050,4950 2100,4950 2150,4950 2200,4950 2250,4950 2300,4950 2350,4950 2400,4950 2450,4950 2500,4950 2550,4950 2600,4950 2650,4950 2700,4950 2750,4950 2800,4950 2850,4950 2900,4950 2950,4950 3000,4950 3050,4950 3100,4950 3150,4950 3200,4950 3250,4950 3300,4950 3350,4950 3400,4950 3450,4950 3500,4950 3550,4950 3600,4950 3650,4950 3700,4950 3750,4950 3800,4950 3850,4950 3900,4950 3950,4950 4000,4950 4050,4950 4100,4950 4150,4950
IO0: C6.1 R4.1 S1.3 S1.4 U2.12 | length 1291.6
  Top Layer w20: U2.12 2105.39,3077.8 2045,3138.19 2045,3362.63 2243.24,3560.87 S1.4 2312.8,3574.65 2235,3652.44 2235,3827.56 2312.8,3905.35 S1.3 2312.8,3932.91 2280,3965.71 R4.1 C6.1
IO2: P1.3 U2.11 | length 430.1
  Top Layer w40: U2.11 2144.13,3157.32 2430,3443.19 P1.3
IO4: radar1.2 U2.13 | length 958.5
  Top Layer w20: v1@1870,2885 1981.69,2996.69 U2.13
  Bottom Layer w20: radar1.2 1755,2890 1862.17,2890 v1(1866.09,2886.09)
IO5: P1.4 U2.14 | length 710.1
  Top Layer w40: U2.14 2144.13,2918.74 2230,3004.61 2230,3150 P1.4
IO12: R10.1 U2.6 | length 983.1
  Top Layer w20: U2.6 2774.68,3155.75 2864.47,3245.53 2864.47,3246.45 2872,3253.98 v1(2872,3255.06) ; R10.1 2765,3992.5 2780,3977.5 2782.5,3977.5 2785,3975 v1(2850,3975)
  Bottom Layer w20: v1(2850,3975) 2872,3953 v1(2872,3255.06)
IO13: R11.1 U2.7 | length 728
  Top Layer w20: R11.1@2407.5,3555 R11.1 2507.5,3555 v1(2537.5,3525) ; U2.7 2774.68,3234.09 2813,3272.41 2813,3497 2785.77,3524.23 2755.77,3524.23 v1(2755,3525)
  Bottom Layer w20: v1(2537.5,3525) v1(2755,3525)
IO14: R5.2 U2.5 | length 465.3
  Top Layer w20: U2.5 2757.62,3079.23 v1@2814.23,3079.23 ; v1(3180,3080) R5.2
  Bottom Layer w20: v1(2815,3080) v1(3180,3080)
IO15: R9.1 U2.10 | length 1484.6
  Top Layer w20: U2.10 2144.76,3234.49 2264.23,3353.96 2264.23,3359.23 v1(2265,3360) ; R9.1 2813.28,4070 2825,4058.28 v1(2825,4010)
  Bottom Layer w20: v1(2265,3360) 2298,3393 2777,3393 2780,3390 v1(2785,3390) 2785,3970 v1(2825,4010)
IO16: R6.2 U2.4 | length 462.1
  Top Layer w20: U2.4 2758.7,3000 2798.92,3000 2823.92,3025 ; 2825,3025 2900,3100 R6.2
  Bottom Layer w20: 2825,3025 2825,3026.08 2835,3036.08
NetBT1_1: BT1.1 U1.5 | length 1202.7
  Top Layer w40: BT1.1@1190.28,4520 1190.28,4304.72 1660,3835 1960.5,3835 U1.5
NetBT1_2: BT1.2 U1.6 | length 2984.7
  Bottom Layer w40: U1.6 1825,3694.91 1825,4025 1950,4150 3690.35,4150 BT1.2@4060.35,4520
NetD1_1: D1.1 Q2.3 RL1.4 | length 517.6
  Top Layer w20: D1.1 2944,3747.07 Q2.3 2944,3621.28 2945.28,3620 3010,3620 3185.87,3444.13 3225.87,3444.13 RL1.4
NetJ1_1: J1.1 RL1.3 | length 419.2
  Bottom Layer w80: RL1.3 3880,3580 J1.1
NetJ1_2: J1.2 RL1.1 | length 973.2
  Bottom Layer w80: RL1.1 3695,3665 3787.17,3757.17 J1.2
NetLED1_1: LED1.1 R1.1 | length 121.2
  Top Layer w20: LED1.1 1223.85,3095.93 1223.85,3213.85 R1.1
NetLED2_1: LED2.1 R9.2 | length 235.9
  Top Layer w20: LED2.1 2610,3930 2610,4007.5 2670,4067.5 R9.2
  Bottom Layer w20: LED2.1 LED2.1@2655,3892.37
NetLED2_2: LED2.2 R10.2 | length 246.7
  Top Layer w20: LED2.2 2710,3840 2710,3942.5 2670,3982.5 R10.2@2670,3985
  Bottom Layer w20: LED2.2 LED2.2@2662.37,3785
NetLED2_4: LED2.4 R11.2 | length 277.2
  Top Layer w20: R11.2 2423.58,3631.42 2467.5,3631.42 2478.92,3620 v1(2480,3620)
  Bottom Layer w20: v1(2480,3620) 2614.17,3620 2649.17,3585 LED2.4 LED2.4@2649.79,3579.79
NetLS1_2: LS1.2 Q1.3 | length 355.1
  Top Layer w20: Q1.3 3458.24,3116 3584.74,2989.5 LS1.2
NetQ1_1: Q1.1 R5.1 R7.1 | length 151.6
  Top Layer w20: R5.1 R7.1 3297.5,3170 3314.1,3153.4 Q1.1
NetQ2_1: Q2.1 R6.1 R8.1 | length 200.3
  Top Layer w20: Q2.1 2903.3,3526.44 2903.3,3453.3 2917.5,3439.1 2917.5,3427.5 2926.5,3418.5 2926.5,3418.37 2935.87,3409 2936,3409 2952.5,3392.5 2952.5,3375 2967.5,3360 R8.1
OUT+: C1.2 D1.2 IC1.3 LS1.1 radar1.3 RL1.5 U1.3 | length 5497.2
  Top Layer w20: v1(1225.22,2850.22) 1225.22,2950.98 IC1.3 ; v1(1500,2775) 1560,2775 C1.2
  Top Layer w40: v1(1680,3955) 1974.69,3955 U1.3 ; D1.2 2953.9,3908.15 3241.85,3908.15 RL1.5 3485,3665 3485,3340 3595,3230 3820,3230 LS1.1
  Bottom Layer w20: v1@1225.22,2849.78 1300,2775 v1(1500,2775)
  Bottom Layer w40: radar1.3 1270,2505.45 1225.22,2550.22 1225.22,2849.78 v1(1225.22,2850.22) 1225.22,3500.22 v1(1680,3955) ; U1.3 2094.69,4075 3075,4075 RL1.5
RST: C4.1 R2.1 U2.1 | length 226.1
  Top Layer w20: U2.1 2756.28,2763.72 2978.72,2763.72 C4.1
RX: C7.2 U2.15 | length 548.3
  Top Layer w40: C7.2 1775,2590 2024.21,2839.21 U2.15
TX: C7.3 U2.16 | length 381
  Top Layer w40: C7.3 1878.8,2498.8 1878.8,2534.03 2106.02,2761.26 U2.16
pads on no net: BT1.MH1 BT1.MH2 RL1.2

## Polygon pours and split planes (outlines as drawn)
GND on Bottom Layer "GND_L02_P000" (solid, pour order 0): 1000,5000 1000,2405 4200,2405 4200,5000
GND on Top Layer "GND_L01_P001" (solid, pour order 1): 1000,5000 1000,2405 4200,2405 4200,5000

## Keep-outs
Keep-Out Layer:
  the board outline again, w20

## Text inside footprints (layer, text, board x,y; h text height)
LS1: Top Overlay "+" at 4004.5,3018 h60 r180
U1: Mechanical 15 "TP4056" at 1241.93,3600.86 h80; Mechanical 15 "OUT+" at 1621.93,3870.86 h80; Mechanical 15 "B+" at 1776.93,3745.86 h80; Mechanical 15 "B-" at 1761.93,3465.86 h80; Mechanical 15 "OUT-" at 1611.93,3335.86 h80; Mechanical 15 "In-" at 1160.9,3337.41 h80 r344; Mechanical 15 "In+" at 1166.93,3865.86 h80
U2: Mechanical 13 "ANTENNA AREA" at 2750,2452.44 h10 r180; Mechanical 13 "CUTOUT POLYGON" at 2750,2472.44 h10 r180